# Altium PCB FPGA-Oscilloscope.PcbDoc
Units mil, origin at the board's own origin, x right, y up, seen from the top; angles counter-clockwise.
Board outline 8300 x 5800 mil, 2 copper layers (Top Layer, Bottom Layer); 198 components, 346 nets, 1486 pads, 0 vias.
Unrouted connection lines stored in the file: 899.
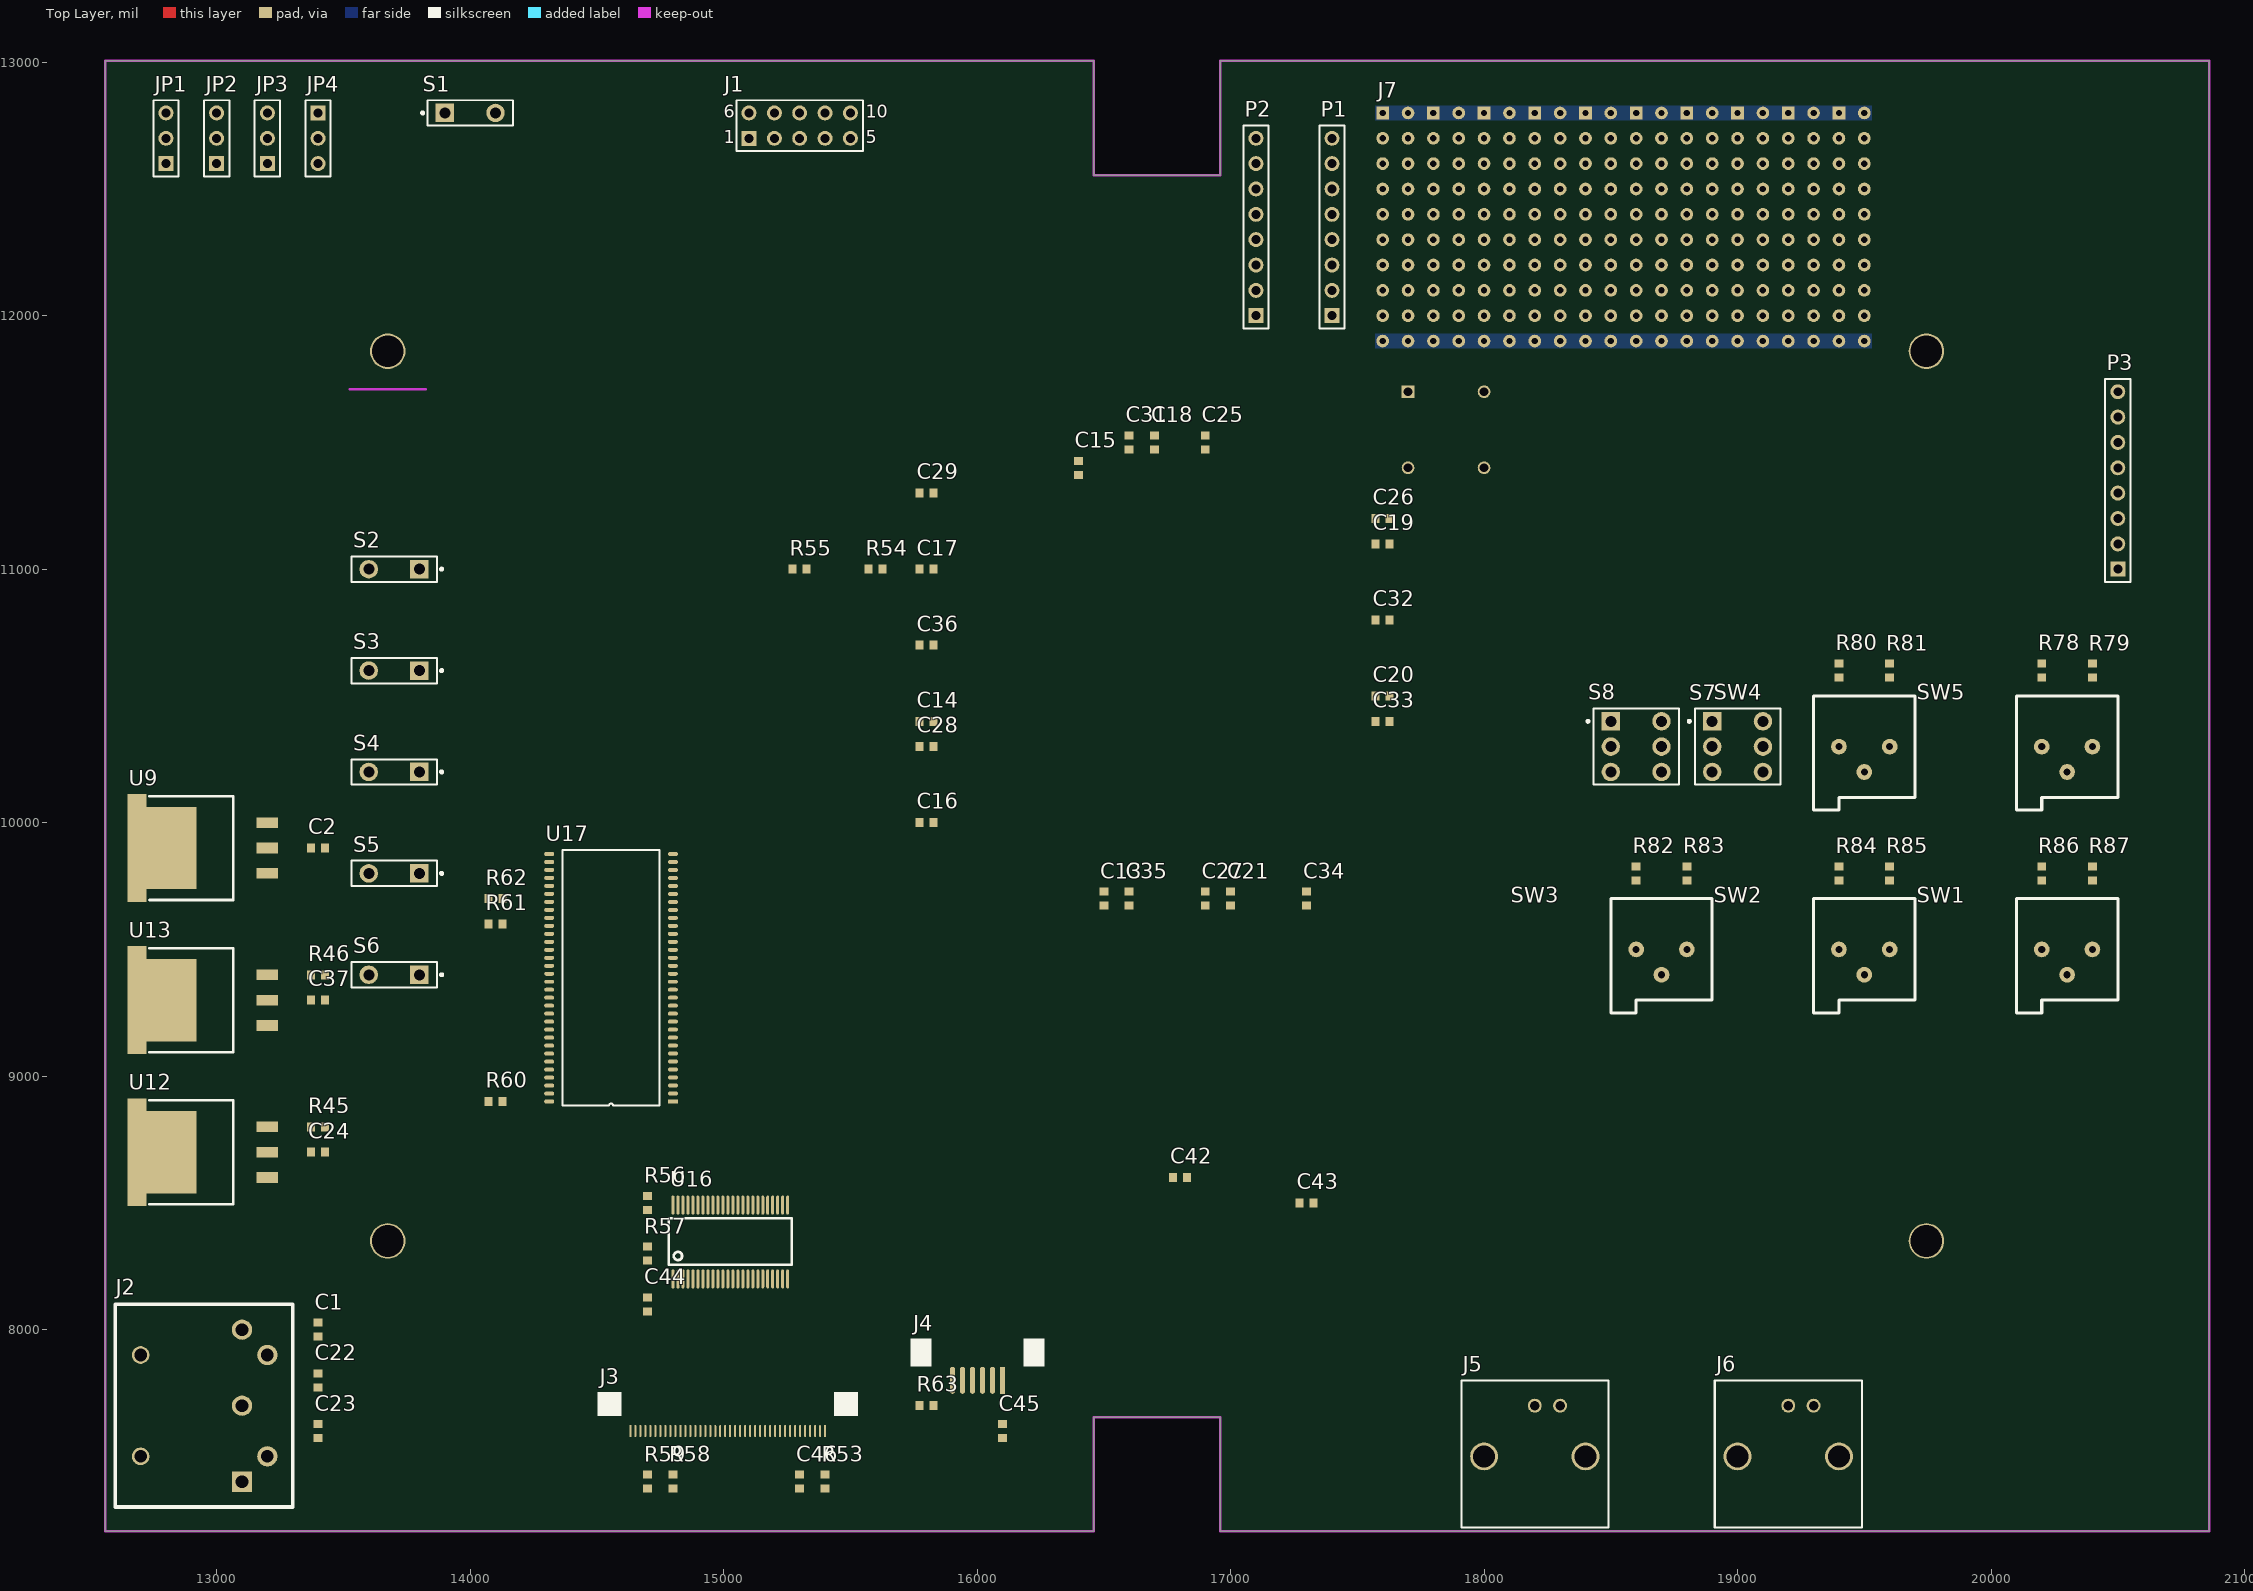
[diagram p0: Top Layer view]
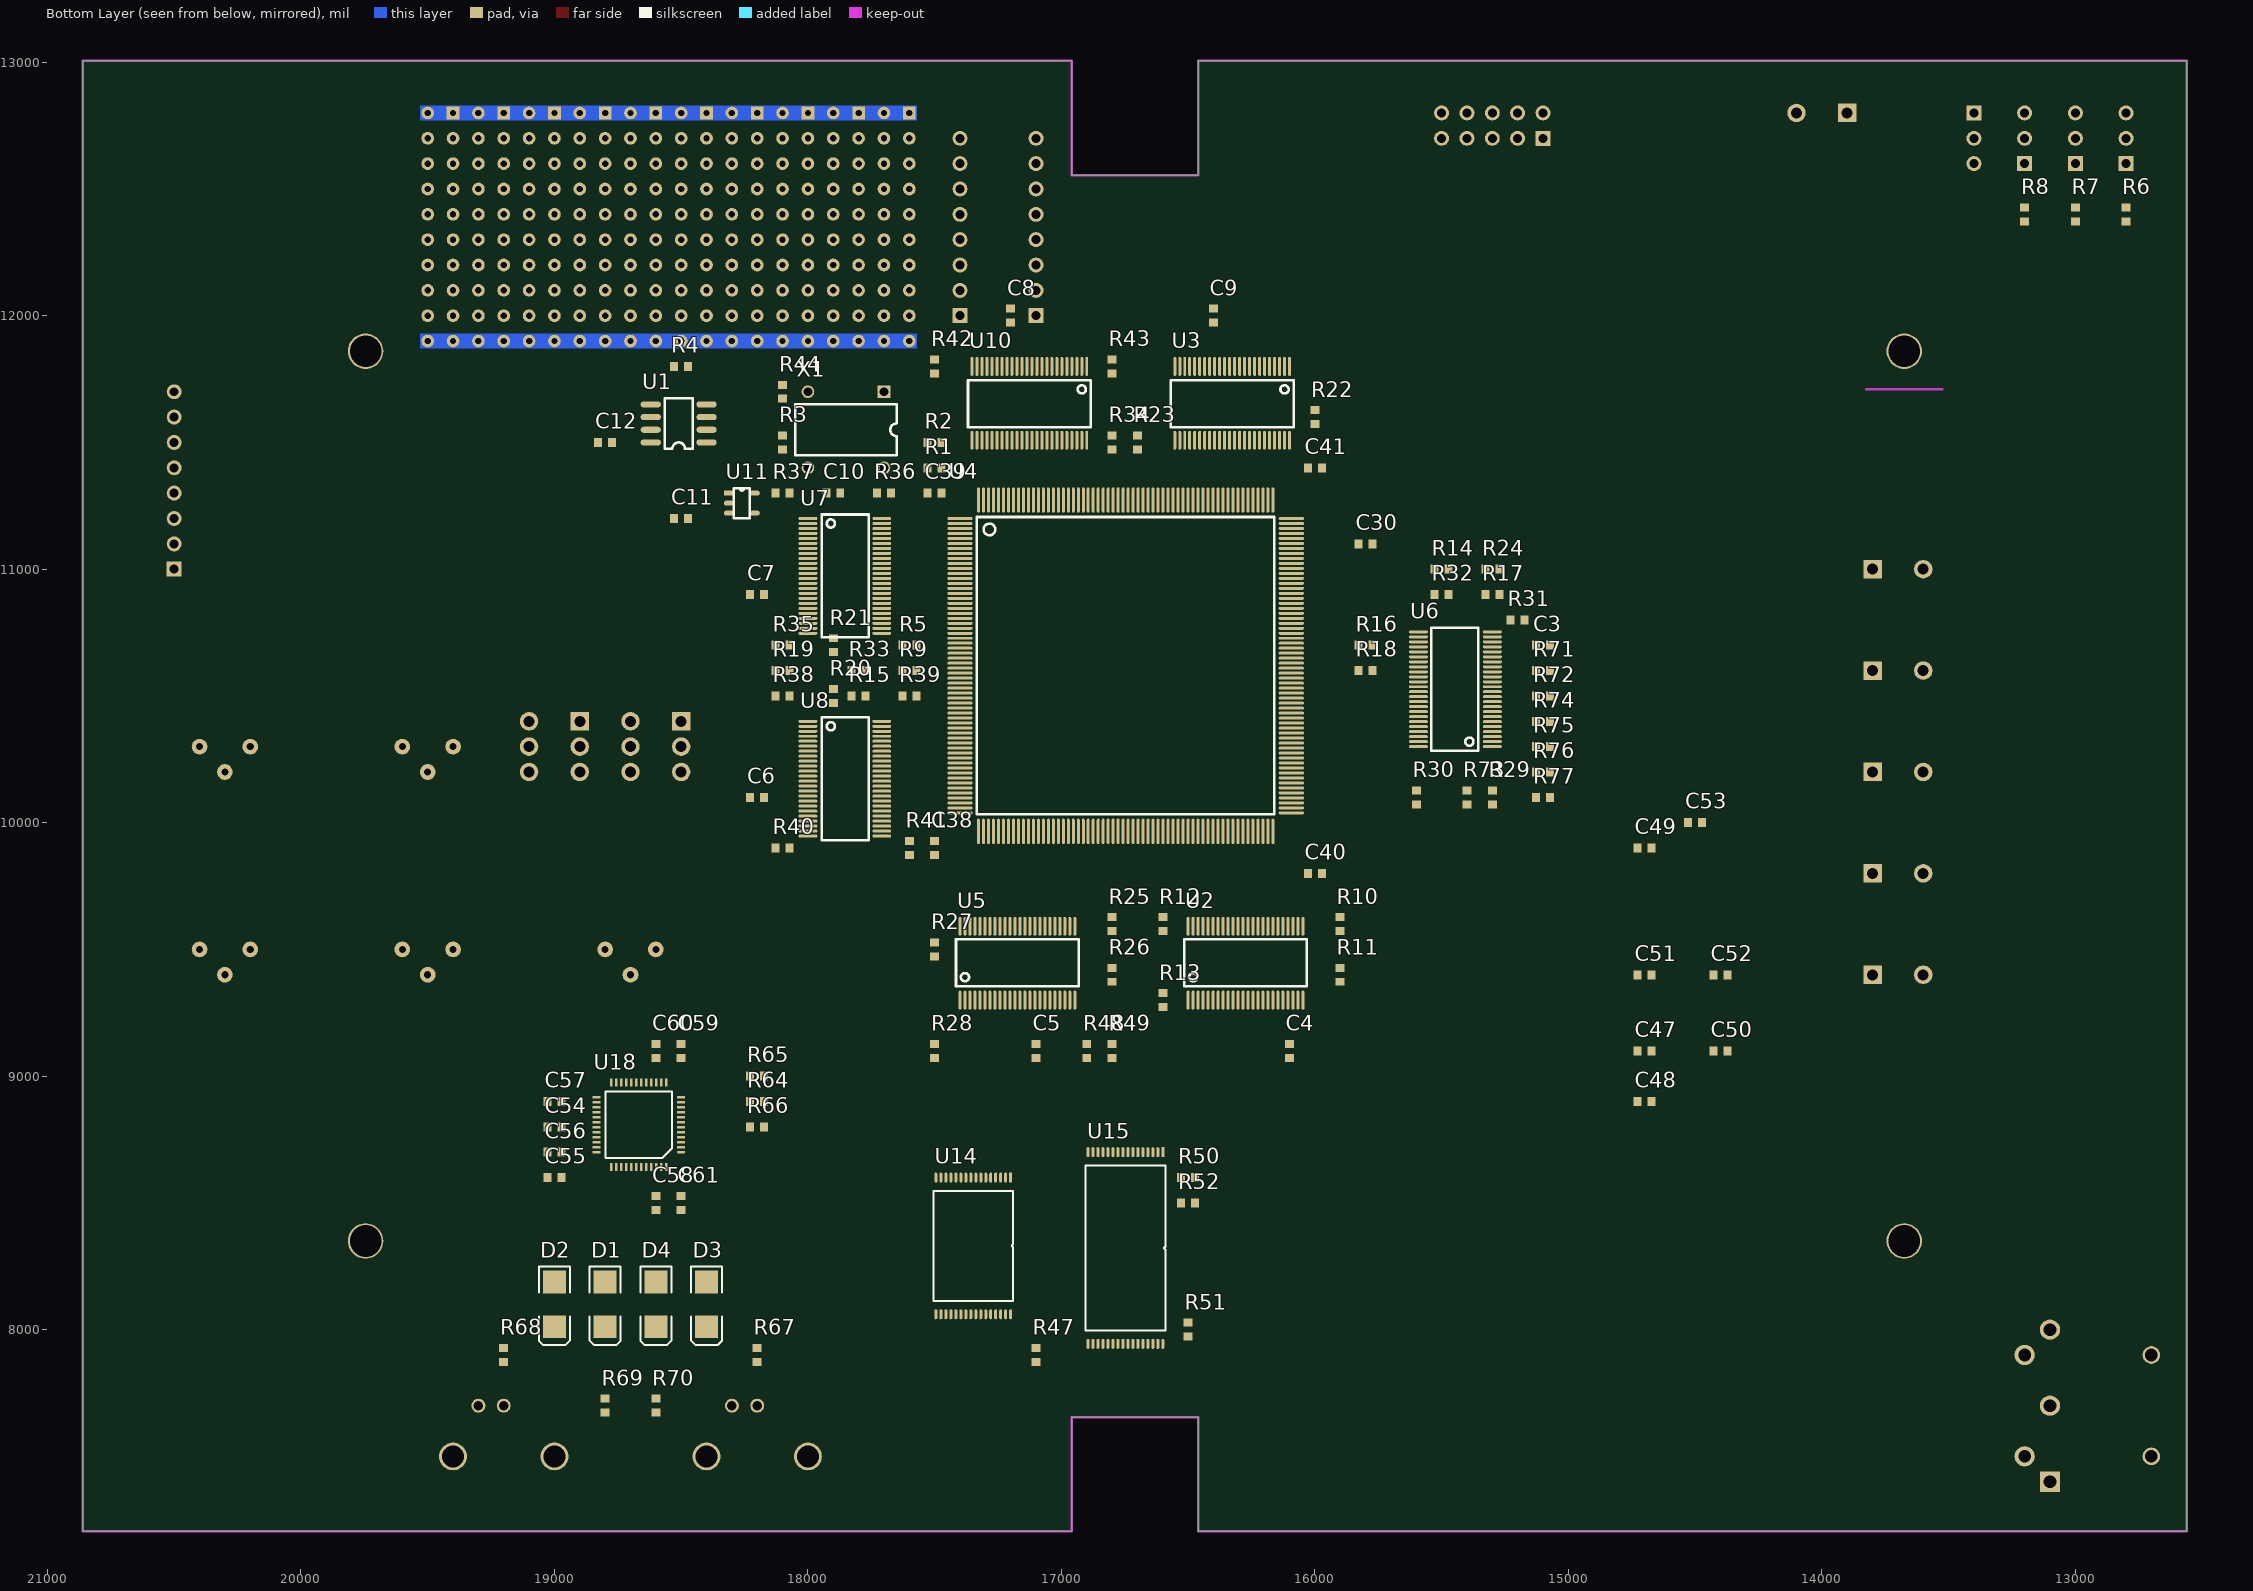
[diagram p1: Bottom Layer view, seen from below]

## Layer stack, top to bottom
Top Layer: signal copper 1.4
Dielectric: dielectric 12.6, FR-4, Dk 4.8
Bottom Layer: signal copper 1.4

## Board outline
12560,7205 12560,13005 16460,13005 16460,12555 16960,12555 16960,13005 20860,13005 20860,7205 16960,7205 16960,7655 16460,7655 16460,7205

## Design rules (kind name [scope] priority, off if disabled: settings)
Clearance [All] p1: gap=8
PolygonConnect [All] p1: connectstyle=Relief reliefconductorwidth=10 reliefentries=4 polygonreliefangle="90 Angle" airgapwidth=10
RoutingVias [All] p1: holewidth=15 width=30 viastyle="Through Hole" minholewidth=15 minwidth=30 maxholewidth=15 maxwidth=30
SMDNeckDown [All] p1: percent=100.000
SolderMaskExpansion [All] p1: expansion=4
Width Power [(InNet('GND') AND InNet('V12+') AND InNet('V12-') AND InNet('VCC') AND InNet('VCC5') AND InNet('VCCA') AND InNet('VCCINT'))] p1: maxlimit=30 minlimit=30 preferedwidth=30 minimp=50.000000 maximp=50.000000 favimp=50.000000
Width [All] p2: maxlimit=10 minlimit=10 preferedwidth=10 minimp=50.000000 maximp=50.000000 favimp=50.000000
28 further rules are at their usual default settings.

## Components (designator, comment, footprint, x,y, rotation, side; value= is the part's Value field where it differs from the comment)
C1 "10uF" 1608[0603] 13400,8000 r90 top
C2 "10uF" 1608[0603] 13400,9900 r180 top
C3 "0.1uF" 1608[0603] 15100,10700 r0 bottom
C4 "0.1uF" 1608[0603] 16100,9100 r90 bottom
C5 "0.1uF" 1608[0603] 17100,9100 r90 bottom
C6 "0.1uF" 1608[0603] 18200,10100 r180 bottom
C7 "0.1uF" 1608[0603] 18200,10900 r180 bottom
C8 "0.1uF" 1608[0603] 17200,12000 r270 bottom
C9 "0.1uF" 1608[0603] 16400,12000 r270 bottom
C10 "0.1uF" 1608[0603] 17900,11300 r180 bottom
C11 "0.1uF" 1608[0603] 18500,11200 r180 bottom
C12 "0.1uF" 1608[0603] 18800,11500 r180 bottom
C13 "0.1uF" 1608[0603] 16500,9700 r90 top
C14 "0.1uF" 1608[0603] 15800,10400 r0 top
C15 "0.1uF" 1608[0603] 16400,11400 r270 top
C16 "0.1uF" 1608[0603] 15800,10000 r0 top
C17 "0.1uF" 1608[0603] 15800,11000 r0 top
C18 "0.1uF" 1608[0603] 16700,11500 r270 top
C19 "0.1uF" 1608[0603] 17600,11100 r180 top
C20 "0.1uF" 1608[0603] 17600,10500 r180 top
C21 "0.1uF" 1608[0603] 17000,9700 r90 top
C22 "10uF" 1608[0603] 13400,7800 r90 top
C23 "10uF" 1608[0603] 13400,7600 r270 top
C24 "10uF" 1608[0603] 13400,8700 r180 top
C25 "0.1uF" 1608[0603] 16900,11500 r270 top
C26 "0.1uF" 1608[0603] 17600,11200 r180 top
C27 "0.1uF" 1608[0603] 16900,9700 r90 top
C28 "0.1uF" 1608[0603] 15800,10300 r0 top
C29 "0.1uF" 1608[0603] 15800,11300 r0 top
C30 "0.1uF" 1608[0603] 15800,11100 r0 bottom
C31 "0.1uF" 1608[0603] 16600,11500 r270 top
C32 "0.1uF" 1608[0603] 17600,10800 r180 top
C33 "0.1uF" 1608[0603] 17600,10400 r180 top
C34 "0.1uF" 1608[0603] 17300,9700 r90 top
C35 "0.1uF" 1608[0603] 16600,9700 r90 top
C36 "0.1uF" 1608[0603] 15800,10700 r0 top
C37 "10uF" 1608[0603] 13400,9300 r180 top
C38 "0.1uF" 1608[0603] 17500,9900 r90 bottom
C39 "0.1uF" 1608[0603] 17500,11300 r0 bottom
C40 "0.1uF" 1608[0603] 16000,9800 r0 bottom
C41 "0.1uF" 1608[0603] 16000,11400 r0 bottom
C42 "0.1uF" 1608[0603] 16800,8600 r180 top
C43 "0.1uF" 1608[0603] 17300,8500 r180 top
C44 "0.1uF" 1608[0603] 14700,8100 r90 top
C45 "0.1uF" 1608[0603] 16100,7600 r90 top
C46 "0.1uF" 1608[0603] 15300,7400 r90 top
C47 "0.1uF" 1608[0603] 14700,9100 r0 bottom
C48 "0.1uF" 1608[0603] 14700,8900 r0 bottom
C49 "0.1uF" 1608[0603] 14700,9900 r0 bottom
C50 "0.1uF" 1608[0603] 14400,9100 r180 bottom
C51 "0.1uF" 1608[0603] 14700,9400 r0 bottom
C52 "0.1uF" 1608[0603] 14400,9400 r180 bottom
C53 "1uF" 1608[0603] 14500,10000 r0 bottom
C54 "" 1608[0603] 19000,8800 r180 bottom
C55 "" 1608[0603] 19000,8600 r180 bottom
C56 "" 1608[0603] 19000,8700 r180 bottom
C57 "" 1608[0603] 19000,8900 r180 bottom
C58 "" 1608[0603] 18600,8500 r90 bottom
C59 "" 1608[0603] 18500,9100 r270 bottom
C60 "" 1608[0603] 18600,9100 r270 bottom
C61 "" 1608[0603] 18500,8500 r90 bottom
D1 "D Schottky" SMB 18800,8100 r270 bottom
D2 "D Schottky" SMB 19000,8100 r270 bottom
D3 "D Schottky" SMB 18400,8100 r270 bottom
D4 "D Schottky" SMB 18600,8100 r270 bottom
J1 "Header 5X2A" HDR2X5_CEN 15100,12700 r0 top
J2 "PS_CONN" DIN5 13300,7300 r180 top
J3 "DISP_CONN" MOLEX-40 15400,7600 r180 top
J4 "TOUCH_CONN" MOLEX-6 16100,7800 r180 top
J5 "BNC" AMP31-5540 18200,7700 r0 top
J6 "BNC" AMP31-5540 19200,7700 r0 top
J7 "Playground" 20x20 17600,12800 r0 top
JP1 "Header 3" HDR1X3 12800,12600 r90 top
JP2 "Header 3" HDR1X3 13000,12600 r90 top
JP3 "Header 3" HDR1X3 13200,12600 r90 top
JP4 "Header 3" HDR1X3 13400,12800 r270 top
P1 "Header 8" HDR1X8 17400,12000 r90 top
P2 "Header 8" HDR1X8 17100,12000 r90 top
P3 "Header 8" HDR1X8 20500,11000 r90 top
R1 "1K" 1608[0603] 17500,11400 r0 bottom
R2 "1K" 1608[0603] 17500,11500 r0 bottom
R3 "10K" 1608[0603] 18100,11500 r90 bottom
R4 "10K" 1608[0603] 18500,11800 r0 bottom
R5 "25" 1608[0603] 17600,10700 r0 bottom
R6 "10K" 1608[0603] 12800,12400 r90 bottom
R7 "10K" 1608[0603] 13000,12400 r90 bottom
R8 "10K" 1608[0603] 13200,12400 r90 bottom
R9 "1K" 1608[0603] 17600,10600 r180 bottom
R10 "10K" 1608[0603] 15900,9600 r90 bottom
R11 "10K" 1608[0603] 15900,9400 r90 bottom
R12 "10K" 1608[0603] 16600,9600 r90 bottom
R13 "10K" 1608[0603] 16600,9300 r270 bottom
R14 "10K" 1608[0603] 15500,11000 r0 bottom
R15 "10K" 1608[0603] 17800,10500 r180 bottom
R16 "10K" 1608[0603] 15800,10700 r0 bottom
R17 "10K" 1608[0603] 15300,10900 r0 bottom
R18 "10K" 1608[0603] 15800,10600 r0 bottom
R19 "10K" 1608[0603] 18100,10600 r180 bottom
R20 "10K" 1608[0603] 17900,10500 r90 bottom
R21 "10K" 1608[0603] 17900,10700 r270 bottom
R22 "10K" 1608[0603] 16000,11600 r90 bottom
R23 "10K" 1608[0603] 16700,11500 r90 bottom
R24 "10K" 1608[0603] 15300,11000 r0 bottom
R25 "10K" 1608[0603] 16800,9600 r270 bottom
R26 "10K" 1608[0603] 16800,9400 r90 bottom
R27 "10K" 1608[0603] 17500,9500 r270 bottom
R28 "10K" 1608[0603] 17500,9100 r270 bottom
R29 "10K" 1608[0603] 15300,10100 r270 bottom
R30 "10K" 1608[0603] 15600,10100 r270 bottom
R31 "10K" 1608[0603] 15200,10800 r180 bottom
R32 "10K" 1608[0603] 15500,10900 r180 bottom
R33 "10K" 1608[0603] 17800,10600 r0 bottom
R34 "10K" 1608[0603] 16800,11500 r270 bottom
R35 "10K" 1608[0603] 18100,10700 r0 bottom
R36 "10K" 1608[0603] 17700,11300 r180 bottom
R37 "10K" 1608[0603] 18100,11300 r0 bottom
R38 "10K" 1608[0603] 18100,10500 r0 bottom
R39 "10K" 1608[0603] 17600,10500 r180 bottom
R40 "10K" 1608[0603] 18100,9900 r0 bottom
R41 "10K" 1608[0603] 17600,9900 r270 bottom
R42 "10K" 1608[0603] 17500,11800 r270 bottom
R43 "10K" 1608[0603] 16800,11800 r270 bottom
R44 "10K" 1608[0603] 18100,11700 r90 bottom
R45 "1" 1608[0603] 13400,8800 r0 top
R46 "1" 1608[0603] 13400,9400 r0 top
R47 "10K" 1608[0603] 17100,7900 r270 bottom
R48 "10K" 1608[0603] 16900,9100 r90 bottom
R49 "10K" 1608[0603] 16800,9100 r90 bottom
R50 "10K" 1608[0603] 16500,8600 r180 bottom
R51 "10K" 1608[0603] 16500,8000 r90 bottom
R52 "10K" 1608[0603] 16500,8500 r180 bottom
R53 "150" 1608[0603] 15400,7400 r90 top
R54 "10K" 1608[0603] 15600,11000 r180 top
R55 "10K" 1608[0603] 15300,11000 r0 top
R56 "10K" 1608[0603] 14700,8500 r90 top
R57 "10K" 1608[0603] 14700,8300 r90 top
R58 "10K" 1608[0603] 14800,7400 r270 top
R59 "10K" 1608[0603] 14700,7400 r270 top
R60 "10K" 1608[0603] 14100,8900 r180 top
R61 "10K" 1608[0603] 14100,9600 r180 top
R62 "10K" 1608[0603] 14100,9700 r180 top
R63 "10K" 1608[0603] 15800,7700 r0 top
R64 "10K" 1608[0603] 18200,8900 r0 bottom
R65 "10K" 1608[0603] 18200,9000 r0 bottom
R66 "10K" 1608[0603] 18200,8800 r0 bottom
R67 "10M" 1608[0603] 18200,7900 r270 bottom
R68 "10M" 1608[0603] 19200,7900 r270 bottom
R69 "3.3M" 1608[0603] 18800,7700 r270 bottom
R70 "3.3M" 1608[0603] 18600,7700 r270 bottom
R71 "10K" 1608[0603] 15100,10600 r180 bottom
R72 "10K" 1608[0603] 15100,10500 r180 bottom
R73 "10K" 1608[0603] 15400,10100 r270 bottom
R74 "10K" 1608[0603] 15100,10400 r180 bottom
R75 "10K" 1608[0603] 15100,10300 r180 bottom
R76 "10K" 1608[0603] 15100,10200 r180 bottom
R77 "10K" 1608[0603] 15100,10100 r180 bottom
R78 "10K" 1608[0603] 20200,10600 r90 top
R79 "10K" 1608[0603] 20400,10600 r90 top
R80 "10K" 1608[0603] 19400,10600 r90 top
R81 "10K" 1608[0603] 19600,10600 r90 top
R82 "10K" 1608[0603] 18600,9800 r90 top
R83 "10K" 1608[0603] 18800,9800 r90 top
R84 "10K" 1608[0603] 19400,9800 r90 top
R85 "10K" 1608[0603] 19600,9800 r90 top
R86 "10K" 1608[0603] 20200,9800 r90 top
R87 "10K" 1608[0603] 20400,9800 r90 top
S1 "SW-PB" SPST-2 14000,12800 r0 top
S2 "SW-PB" SPST-2 13700,11000 r180 top
S3 "SW-PB" SPST-2 13700,10600 r180 top
S4 "SW-PB" SPST-2 13700,10200 r180 top
S5 "SW-PB" SPST-2 13700,9800 r180 top
S6 "SW-PB" SPST-2 13700,9400 r180 top
S7 "SW-DPDT" DPDT-6 19000,10300 r0 top
S8 "SW-DPDT" DPDT-6 18600,10300 r0 top
SW1 "SW-ROTARY" VR4 20400,9500 r180 top
SW2 "SW-ROTARY" VR4 19600,9500 r180 top
SW3 "SW-ROTARY" VR4 18800,9500 r180 top
SW4 "SW-ROTARY" VR4 19600,10300 r180 top
SW5 "SW-ROTARY" VR4 20400,10300 r180 top
U1 "EPCS1" SO-8 18400,11500 r0 bottom
U2 "74LVTH162245" TSSOP48 16500,9300 r180 bottom
U3 "74LVTH162245" TSSOP48 16100,11800 r0 bottom
U4 "EP3C25Q240" PQFP240 17400,11200 r180 bottom
U5 "74LVTH162245" TSSOP48 17400,9300 r180 bottom
U6 "74LVTH162245" TSSOP48 15300,10300 r90 bottom
U7 "74LVTH162245" TSSOP48 18000,11200 r270 bottom
U8 "74LVTH162245" TSSOP48 18000,10400 r270 bottom
U9 "LM1086" TO-263 13200,9800 r0 top
U10 "74LVTH162245" TSSOP48 16900,11800 r0 bottom
U11 "ADM8316" SOT-23 18300,11300 r180 bottom
U12 "LM1086" TO-263 13200,8600 r0 top
U13 "LM1086" TO-263 13200,9200 r0 top
U14 "SST39VF020" "TSOP-32 8x14mm" 17200,8600 r270 bottom
U15 "AS7C31024B" "TSOP-32 8x20mm" 16600,8700 r270 bottom
U16 "74LVTH162245" TSSOP48 14800,8200 r0 top
U17 "MSM5416283" SSOP64 14800,8900 r180 top
U18 "AD9288" QFP24-7x7 18500,8700 r0 bottom
X1 "OSCOE" DIP8-4 17700,11700 r270 bottom

## Footprints (in the part's own frame and the unit in brackets; to place one, negate y for a bottom-side part, rotate by r counter-clockwise, add the part's x,y. Pads: shape width x height; smd on the part's side, far side on the other; paste and mask are expansions set on the pad)
20x20 [mil]
  rect 50x50 hole 25: 1(200,0) 1(400,0) 1(600,0) 1(800,0) 1(1000,0) 1(1200,0) 1(1400,0) 1(1600,0) 1(1800,0) PGVCC(0,0)
  round 50 hole 25: 2(0,-100) 2(200,-100) 2(400,-100) 2(600,-100) 2(800,-100) 2(1000,-100) 2(1200,-100) 2(1400,-100) 2(1600,-100) 2(1800,-100) 3(0,-200) 3(200,-200) 3(400,-200) 3(600,-200) 3(800,-200) 3(1000,-200) 3(1200,-200) 3(1400,-200) 3(1600,-200) 3(1800,-200) 4(0,-300) 4(200,-300) 4(400,-300) 4(600,-300) 4(800,-300) 4(1000,-300) 4(1200,-300) 4(1400,-300) 4(1600,-300) 4(1800,-300) 5(0,-400) 5(200,-400) 5(400,-400) 5(600,-400) 5(800,-400) 5(1000,-400) 5(1200,-400) 5(1400,-400) 5(1600,-400) 5(1800,-400) 6(0,-500) 6(200,-500) 6(400,-500) 6(600,-500) 6(800,-500) 6(1000,-500) 6(1200,-500) 6(1400,-500) 6(1600,-500) 6(1800,-500) 7(0,-600) 7(200,-600) 7(400,-600) 7(600,-600) 7(800,-600) 7(1000,-600) 7(1200,-600) 7(1400,-600) 7(1600,-600) 7(1800,-600) 8(0,-700) 8(200,-700) 8(400,-700) 8(600,-700) 8(800,-700) 8(1000,-700) 8(1200,-700) 8(1400,-700) 8(1600,-700) 8(1800,-700) 9(0,-800) 9(200,-800) 9(400,-800) 9(600,-800) 9(800,-800) 9(1000,-800) 9(1200,-800) 9(1400,-800) 9(1600,-800) 9(1800,-800) 10(200,-900) 10(400,-900) 10(600,-900) 10(800,-900) 10(1000,-900) 10(1200,-900) 10(1400,-900) 10(1600,-900) 10(1800,-900) 11(100,-900) 11(300,-900) 11(500,-900) 11(700,-900) 11(900,-900) 11(1100,-900) 11(1300,-900) 11(1500,-900) 11(1700,-900) 11(1900,-900) 12(100,-800) 12(300,-800) 12(500,-800) 12(700,-800) 12(900,-800) 12(1100,-800) 12(1300,-800) 12(1500,-800) 12(1700,-800) 12(1900,-800) 13(100,-700) 13(300,-700) 13(500,-700) 13(700,-700) 13(900,-700) 13(1100,-700) 13(1300,-700) 13(1500,-700) 13(1700,-700) 13(1900,-700) 14(100,-600) 14(300,-600) 14(500,-600) 14(700,-600) 14(900,-600) 14(1100,-600) 14(1300,-600) 14(1500,-600) 14(1700,-600) 14(1900,-600) 15(100,-500) 15(300,-500) 15(500,-500) 15(700,-500) 15(900,-500) 15(1100,-500) 15(1300,-500) 15(1500,-500) 15(1700,-500) 15(1900,-500) 16(100,-400) 16(300,-400) 16(500,-400) 16(700,-400) 16(900,-400) 16(1100,-400) 16(1300,-400) 16(1500,-400) 16(1700,-400) 16(1900,-400) 17(100,-300) 17(300,-300) 17(500,-300) 17(700,-300) 17(900,-300) 17(1100,-300) 17(1300,-300) 17(1500,-300) 17(1700,-300) 17(1900,-300) 18(100,-200) 18(300,-200) 18(500,-200) 18(700,-200) 18(900,-200) 18(1100,-200) 18(1300,-200) 18(1500,-200) 18(1700,-200) 18(1900,-200) 19(100,-100) 19(300,-100) 19(500,-100) 19(700,-100) 19(900,-100) 19(1100,-100) 19(1300,-100) 19(1500,-100) 19(1700,-100) 19(1900,-100) 20(100,0) 20(300,0) 20(500,0) 20(700,0) 20(900,0) 20(1100,0) 20(1300,0) 20(1500,0) 20(1700,0) 20(1900,0) PGGND(0,-900)
  Bottom Layer region: -30,-930 1930,-930 1930,-870 -30,-870
  Bottom Layer region: -30,-30 1930,-30 1930,30 -30,30
1608[0603] [mm] "Chip Capacitor, Body 1.6x0.8mm, IPC High Density"
  rect 0.8x0.9 smd: 1(-0.7,0) 2(0.7,0)
  body extent -0.87,-0.48 0.87,0.48, height 1.3
AMP31-5540 [mil]
  round 55 hole 38: 1(0,0) 2(100,0)
  round 110 hole 86: ""(-200,-200) ""(200,-200)
  silkscreen extent -290,-480 290,100
DIN5 [mil]
  rect 80x80 hole 50: 1(200,-100)
  round 80 hole 50: 2(100,-200) 3(200,-400) 4(100,-600) 5(200,-700)
  round 70 hole 50: ""(600,-200) ""(600,-600)
  silkscreen extent 0,-800 700,0
DIP8-4 [mil]
  rect 50x50 hole 35: 1(0,0)
  round 50 hole 35: 2(0,-300) 3(300,-300) 4(300,0)
  silkscreen extent 50,-350 250,50
DPDT-6 [mm] "Switch; 6 Leads"
  rect 1.85x1.85 hole 1.1: 1(-2.54,2.54)
  round 1.85 hole 1.1: 2(-2.54,0) 3(-2.54,-2.54) 4(2.54,-2.54) 5(2.54,0) 6(2.54,2.54)
  silkscreen extent -4.96,-3.81 4.28,3.81
HDR1X3 [mm] "Connector; Header; 3 Position"
  rect 1.5x1.5 hole 0.9: 1(0,0)
  round 1.5 hole 0.9: 2(2.54,0) 3(5.08,0)
  silkscreen extent -1.27,-1.27 6.35,1.27
HDR1X8 [mm] "Connector; Header; 8 Position"
  rect 1.5x1.5 hole 0.9: 1(0,0)
  round 1.5 hole 0.9: 2(2.54,0) 3(5.08,0) 4(7.62,0) 5(10.16,0) 6(12.7,0) 7(15.24,0) 8(17.78,0)
  silkscreen extent -1.27,-1.27 19.05,1.27
HDR2X5_CEN [mm] "Connector; Header; 5x2 Position"
  rect 1.5x1.5 hole 0.9: 1(0,0)
  round 1.5 hole 0.9: 2(2.54,0) 3(5.08,0) 4(7.62,0) 5(10.16,0) 6(0,2.54) 7(2.54,2.54) 8(5.08,2.54) 9(7.62,2.54) 10(10.16,2.54)
  silkscreen extent -1.27,-1.27 11.43,3.81
MOLEX-6 [mm]
  rect 0.5x2.7 smd: 1(0,0)
  oval 0.5x2.7 smd: 2(1,0) 3(2,0) 4(3,0) 5(4,0) 6(5,0)
  silkscreen extent -4.2,-4.2 9.2,-1.4
MOLEX-40 [mm]
  rect 0.2x1.2 smd: 1(0,0) 10(4.5,0) 20(9.5,0) 30(14.5,0) 40(19.5,0)
  oval 0.2x1.2 smd: 2(0.5,0) 3(1,0) 4(1.5,0) 5(2,0) 6(2.5,0) 7(3,0) 8(3.5,0) 9(4,0) 11(5,0) 12(5.5,0) 13(6,0) 14(6.5,0) 15(7,0) 16(7.5,0) 17(8,0) 18(8.5,0) 19(9,0) 21(10,0) 22(10.5,0) 23(11,0) 24(11.5,0) 25(12,0) 26(12.5,0) 27(13,0) 28(13.5,0) 29(14,0) 31(15,0) 32(15.5,0) 33(16,0) 34(16.5,0) 35(17,0) 36(17.5,0) 37(18,0) 38(18.5,0) 39(19,0)
  silkscreen extent -3.3,-3.9 22.8,-1.5
PQFP240 [mm]
  oval 2.54x0.3 smd: 1(0,0) 2(0,-0.5) 3(0,-1) 4(0,-1.5) 5(0,-2) 6(0,-2.5) 7(0,-3) 8(0,-3.5) 9(0,-4) 10(0,-4.5) 11(0,-5) 12(0,-5.5) 13(0,-6) 14(0,-6.5) 15(0,-7) 16(0,-7.5) 17(0,-8) 18(0,-8.5) 19(0,-9) 20(0,-9.5) 21(0,-10) 22(0,-10.5) 23(0,-11) 24(0,-11.5) 25(0,-12) 26(0,-12.5) 27(0,-13) 28(0,-13.5) 29(0,-14) 30(0,-14.5) 31(0,-15) 32(0,-15.5) 33(0,-16) 34(0,-16.5) 35(0,-17) 36(0,-17.5) 37(0,-18) 38(0,-18.5) 39(0,-19) 40(0,-19.5) 41(0,-20) 42(0,-20.5) 43(0,-21) 44(0,-21.5) 45(0,-22) 46(0,-22.5) 47(0,-23) 48(0,-23.5) 49(0,-24) 50(0,-24.5) 51(0,-25) 52(0,-25.5) 53(0,-26) 54(0,-26.5) 55(0,-27) 56(0,-27.5) 57(0,-28) 58(0,-28.5) 59(0,-29) 60(0,-29.5) 121(33.2,-29.5) 122(33.2,-29) 123(33.2,-28.5) 124(33.2,-28) 125(33.2,-27.5) 126(33.2,-27) 127(33.2,-26.5) 128(33.2,-26) 129(33.2,-25.5) 130(33.2,-25) 131(33.2,-24.5) 132(33.2,-24) 133(33.2,-23.5) 134(33.2,-23) 135(33.2,-22.5) 136(33.2,-22) 137(33.2,-21.5) 138(33.2,-21) 139(33.2,-20.5) 140(33.2,-20) 141(33.2,-19.5) 142(33.2,-19) 143(33.2,-18.5) 144(33.2,-18) 145(33.2,-17.5) 146(33.2,-17) 147(33.2,-16.5) 148(33.2,-16) 149(33.2,-15.5) 150(33.2,-15) 151(33.2,-14.5) 152(33.2,-14) 153(33.2,-13.5) 154(33.2,-13) 155(33.2,-12.5) 156(33.2,-12) 157(33.2,-11.5) 158(33.2,-11) 159(33.2,-10.5) 160(33.2,-10) 161(33.2,-9.5) 162(33.2,-9) 163(33.2,-8.5) 164(33.2,-8) 165(33.2,-7.5) 166(33.2,-7) 167(33.2,-6.5) 168(33.2,-6) 169(33.2,-5.5) 170(33.2,-5) 171(33.2,-4.5) 172(33.2,-4) 173(33.2,-3.5) 174(33.2,-3) 175(33.2,-2.5) 176(33.2,-2) 177(33.2,-1.5) 178(33.2,-1) 179(33.2,-0.5) 180(33.2,0)
  oval 0.3x2.54 smd: 61(1.85,-31.35) 62(2.35,-31.35) 63(2.85,-31.35) 64(3.35,-31.35) 65(3.85,-31.35) 66(4.35,-31.35) 67(4.85,-31.35) 68(5.35,-31.35) 69(5.85,-31.35) 70(6.35,-31.35) 71(6.85,-31.35) 72(7.35,-31.35) 73(7.85,-31.35) 74(8.35,-31.35) 75(8.85,-31.35) 76(9.35,-31.35) 77(9.85,-31.35) 78(10.35,-31.35) 79(10.85,-31.35) 80(11.35,-31.35) 81(11.85,-31.35) 82(12.35,-31.35) 83(12.85,-31.35) 84(13.35,-31.35) 85(13.85,-31.35) 86(14.35,-31.35) 87(14.85,-31.35) 88(15.35,-31.35) 89(15.85,-31.35) 90(16.35,-31.35) 91(16.85,-31.35) 92(17.35,-31.35) 93(17.85,-31.35) 94(18.35,-31.35) 95(18.85,-31.35) 96(19.35,-31.35) 97(19.85,-31.35) 98(20.35,-31.35) 99(20.85,-31.35) 100(21.35,-31.35) 101(21.85,-31.35) 102(22.35,-31.35) 103(22.85,-31.35) 104(23.35,-31.35) 105(23.85,-31.35) 106(24.35,-31.35) 107(24.85,-31.35) 108(25.35,-31.35) 109(25.85,-31.35) 110(26.35,-31.35) 111(26.85,-31.35) 112(27.35,-31.35) 113(27.85,-31.35) 114(28.35,-31.35) 115(28.85,-31.35) 116(29.35,-31.35) 117(29.85,-31.35) 118(30.35,-31.35) 119(30.85,-31.35) 120(31.35,-31.35) 181(31.35,1.85) 182(30.85,1.85) 183(30.35,1.85) 184(29.85,1.85) 185(29.35,1.85) 186(28.85,1.85) 187(28.35,1.85) 188(27.85,1.85) 189(27.35,1.85) 190(26.85,1.85) 191(26.35,1.85) 192(25.85,1.85) 193(25.35,1.85) 194(24.85,1.85) 195(24.35,1.85) 196(23.85,1.85) 197(23.35,1.85) 198(22.85,1.85) 199(22.35,1.85) 200(21.85,1.85) 201(21.35,1.85) 202(20.85,1.85) 203(20.35,1.85) 204(19.85,1.85) 205(19.35,1.85) 206(18.85,1.85) 207(18.35,1.85) 208(17.85,1.85) 209(17.35,1.85) 210(16.85,1.85) 211(16.35,1.85) 212(15.85,1.85) 213(15.35,1.85) 214(14.85,1.85) 215(14.35,1.85) 216(13.85,1.85) 217(13.35,1.85) 218(12.85,1.85) 219(12.35,1.85) 220(11.85,1.85) 221(11.35,1.85) 222(10.85,1.85) 223(10.35,1.85) 224(9.85,1.85) 225(9.35,1.85) 226(8.85,1.85) 227(8.35,1.85) 228(7.85,1.85) 229(7.35,1.85) 230(6.85,1.85) 231(6.35,1.85) 232(5.85,1.85) 233(5.35,1.85) 234(4.85,1.85) 235(4.35,1.85) 236(3.85,1.85) 237(3.35,1.85) 238(2.85,1.85) 239(2.35,1.85) 240(1.85,1.85)
  silkscreen extent 1.7,-29.62 31.5,0.15
QFP24-7x7 [mm]
  oval 0.8x0.25 smd: 1(0,0)
  rect 0.8x0.25 smd: 2(0,-0.5) 3(0,-1) 4(0,-1.5) 5(0,-2) 6(0,-2.5) 7(0,-3) 8(0,-3.5) 9(0,-4) 10(0,-4.5) 11(0,-5) 12(0,-5.5) 25(8.5,-5.5) 26(8.5,-5) 27(8.5,-4.5) 28(8.5,-4) 29(8.5,-3.5) 30(8.5,-3) 31(8.5,-2.5) 32(8.5,-2) 33(8.5,-1.5) 34(8.5,-1) 35(8.5,-0.5) 36(8.5,0)
  rect 0.25x0.8 smd: 13(1.5,-7) 14(2,-7) 15(2.5,-7) 16(3,-7) 17(3.5,-7) 18(4,-7) 19(4.5,-7) 20(5,-7) 21(5.5,-7) 22(6,-7) 23(6.5,-7) 24(7,-7) 37(7,1.5) 38(6.5,1.5) 39(6,1.5) 40(5.5,1.5) 41(5,1.5) 42(4.5,1.5) 43(4,1.5) 44(3.5,1.5) 45(3,1.5) 46(2.5,1.5) 47(2,1.5) 48(1.5,1.5)
  silkscreen extent 0.94,-6.07 7.56,0.56
SMB [mm] "DO-214-AA/SMB; 2 C-Bend Leads; Body 5.3 x 3.6 mm, inc. leads (LxW)"
  rect 2.3x2.3 smd: 1(-2.25,0) 2(2.25,0)
  silkscreen extent -3.8,-1.55 4.1,1.55
SO-8 [mil]
  oval 80x24 smd: 1(0,0) 2(0,-50) 3(0,-100) 4(0,-150) 5(220,-150) 6(220,-100) 7(220,-50) 8(220,0)
  silkscreen extent 55,-175 165,25
SOT-23 [mm]
  rect 1x0.5 smd: 1(-0.3,0)
  oval 1x0.5 smd: 2(-0.3,-1) 3(-0.3,-2) 4(2.3,-2) 5(2.3,0)
  silkscreen extent 0.2,-2.5 1.78,0.5
SPST-2 [mm] "Switch; 2 Leads"
  rect 1.85x1.85 hole 1.1: 1(-2.54,0)
  round 1.85 hole 1.1: 2(2.54,0)
  silkscreen extent -4.89,-1.27 4.28,1.27
SSOP64 [mm]
  rect 1x0.4 smd: 1(0,0)
  oval 1x0.4 smd: 2(0,-0.8) 3(0,-1.6) 4(0,-2.4) 5(0,-3.2) 6(0,-4) 7(0,-4.8) 8(0,-5.6) 9(0,-6.4) 10(0,-7.2) 11(0,-8) 12(0,-8.8) 13(0,-9.6) 14(0,-10.4) 15(0,-11.2) 16(0,-12) 17(0,-12.8) 18(0,-13.6) 19(0,-14.4) 20(0,-15.2) 21(0,-16) 22(0,-16.8) 23(0,-17.6) 24(0,-18.4) 25(0,-19.2) 26(0,-20) 27(0,-20.8) 28(0,-21.6) 29(0,-22.4) 30(0,-23.2) 31(0,-24) 32(0,-24.8) 33(12.4,-24.8) 34(12.4,-24) 35(12.4,-23.2) 36(12.4,-22.4) 37(12.4,-21.6) 38(12.4,-20.8) 39(12.4,-20) 40(12.4,-19.2) 41(12.4,-18.4) 42(12.4,-17.6) 43(12.4,-16.8) 44(12.4,-16) 45(12.4,-15.2) 46(12.4,-14.4) 47(12.4,-13.6) 48(12.4,-12.8) 49(12.4,-12) 50(12.4,-11.2) 51(12.4,-10.4) 52(12.4,-9.6) 53(12.4,-8.8) 54(12.4,-8) 55(12.4,-7.2) 56(12.4,-6.4) 57(12.4,-5.6) 58(12.4,-4.8) 59(12.4,-4) 60(12.4,-3.2) 61(12.4,-2.4) 62(12.4,-1.6) 63(12.4,-0.8) 64(12.4,0)
  silkscreen extent 1.34,-25.2 11.07,0.4
TO-263 [mil]
  rect 85x42 smd: 1(0,0) 2(0,100) 3(0,200)
  rect 75x425 smd: ""(-515,100)
  rect 200x325 smd: ""(-380,100)
  silkscreen extent -465,-105 -135,305
"TSOP-32 8x14mm" [mm] "Use with SST39VF020"
  rect 1x0.3 smd: 1(0,0)
  oval 1x0.3 smd: 2(0,-0.5) 3(0,-1) 4(0,-1.5) 5(0,-2) 6(0,-2.5) 7(0,-3) 8(0,-3.5) 9(0,-4) 10(0,-4.5) 11(0,-5) 12(0,-5.5) 13(0,-6) 14(0,-6.5) 15(0,-7) 16(0,-7.5) 17(13.7,-7.5) 18(13.7,-7) 19(13.7,-6.5) 20(13.7,-6) 21(13.7,-5.5) 22(13.7,-5) 23(13.7,-4.5) 24(13.7,-4) 25(13.7,-3.5) 26(13.7,-3) 27(13.7,-2.5) 28(13.7,-2) 29(13.7,-1.5) 30(13.7,-1) 31(13.7,-0.5) 32(13.7,0)
  silkscreen extent 1.34,-7.75 12.37,0.25
"TSOP-32 8x20mm" [mm] "Use with AS7C31024B"
  rect 1x0.3 smd: 1(0,0)
  oval 1x0.3 smd: 2(0,-0.5) 3(0,-1) 4(0,-1.5) 5(0,-2) 6(0,-2.5) 7(0,-3) 8(0,-3.5) 9(0,-4) 10(0,-4.5) 11(0,-5) 12(0,-5.5) 13(0,-6) 14(0,-6.5) 15(0,-7) 16(0,-7.5) 17(19.2,-7.5) 18(19.2,-7) 19(19.2,-6.5) 20(19.2,-6) 21(19.2,-5.5) 22(19.2,-5) 23(19.2,-4.5) 24(19.2,-4) 25(19.2,-3.5) 26(19.2,-3) 27(19.2,-2.5) 28(19.2,-2) 29(19.2,-1.5) 30(19.2,-1) 31(19.2,-0.5) 32(19.2,0)
  silkscreen extent 1.33,-7.75 17.86,0.25
TSSOP48 [mm]
  oval 0.3x1.9 smd: 1(0,0) 2(0.5,0) 3(1,0) 4(1.5,0) 5(2,0) 6(2.5,0) 7(3,0) 8(3.5,0) 9(4,0) 10(4.5,0) 11(5,0) 12(5.5,0) 13(6,0) 14(6.5,0) 15(7,0) 16(7.5,0) 17(8,0) 18(8.5,0) 19(9,0) 20(9.5,0) 21(10,0) 22(10.5,0) 23(11,0) 24(11.5,0) 25(11.5,7.4) 26(11,7.4) 27(10.5,7.4) 28(10,7.4) 29(9.5,7.4) 30(9,7.4) 31(8.5,7.4) 32(8,7.4) 33(7.5,7.4) 34(7,7.4) 35(6.5,7.4) 36(6,7.4) 37(5.5,7.4) 38(5,7.4) 39(4.5,7.4) 40(4,7.4) 41(3.5,7.4) 42(3,7.4) 43(2.5,7.4) 44(2,7.4) 45(1.5,7.4) 46(1,7.4) 47(0.5,7.4) 48(0,7.4)
  silkscreen extent -0.4,1.4 11.9,6.1
VR4 [mil]
  round 62 hole 28: 1(0,0) 2(100,100) 3(200,0)
  silkscreen extent -100,-200 300,250

## Part data
C1 C2 C3 C4 C5 C6 C7 C8 C9 C10 C11 C12 C13 C14 C15 C16 C17 C18 C19 C20 C21 C22 C23 C24 C25 C26 C27 C28 C29 C30 C31 C32 C33 C34 C35 C36 C37 C38 C39 C40 C41 C42 C43 C44 C45 C46 C47 C48 C49 C50 C51 C52 C53 C54 C55 C56 C57 C58 C59 C60 C61: library part "Cap Semi", "Capacitor (Semiconductor SIM Model)"
D1 D2 D3 D4: "Schottky Diode"
J1: "Header, 5-Pin, Dual row"
J2: "Elpac Compatible Power Supply Connector"
J3: library part NHD-4.3-Display-connector
J4: library part NHD-4.3-Touch-connector
J5 J6: "BNC Connector"
JP1 JP2 JP3 JP4: "Header, 3-Pin"
P1 P2 P3: "Header, 8-Pin"
R1 R2 R3 R4 R5 R6 R7 R8 R9 R10 R11 R12 R13 R14 R15 R16 R17 R18 R19 R20 R21 R22 R23 R24 R25 R26 R27 R28 R29 R30 R31 R32 R33 R34 R35 R36 R37 R38 R39 R40 R41 R42 R43 R44 R45 R46 R47 R48 R49 R50 R51 R52 R53 R54 R55 R56 R57 R58 R59 R60 R61 R62 R63 R64 R65 R66 R67 R68 R69 R70 R71 R72 R73 R74 R75 R76 R77 R78 R79 R80 R81 R82 R83 R84 R85 R86 R87: library part RES1
S1 S2 S3 S4 S5 S6: "Switch"
S7 S8: "Double-Pole, Double-Throw Switch"
SW1 SW2 SW3 SW4 SW5: "Rotary Encoder"
U1: "Altera Serial Configuration Device"
U2 U3 U5 U6 U7 U8 U10 U16: "16-Bit Bus Transceiver"
U4: "Cyclone III EP3C-25 FPGA PQFP240"
U9 U12 U13: "1.5A Low Dropout Positive Regulator"
U11: "Analog Devices Watchdog Timer and Reset IC"
U14: "Microchip 2 Mbit (256k x 8 bit) Multi-Purpose Flash"
U15: "Alliance 1 Mbit (128k x 8bit) SRAM"
U17: "256K x 16bit VRAM"
U18: "Dual Channel ADC"
X1: "Oscillator with Active High Output Enable"

## Free pads (board coordinates)
  round 140 hole 125: 1(13675,8350) 2(13675,11860) 3(19745,8350) 4(19745,11860)

## Nets (pads, with @x,y where several pads share a name; then routed paths per layer and width w, separated by ;. In a path a pad name is that pad's centre, name@x,y a point inside that pad or via, vN(x,y) a via of type N, cw(c..) or ccw(c..) an arc to the next point about the centre after c; other vN are vias at no path point)
AB0: U2.23 U14.20 U15.20 U17.37
AB1: U2.22 U14.19 U15.19 U17.36
AB2: U2.20 U14.18 U15.18 U17.35
AB3: U2.19 U14.17 U15.17 U17.34
AB4: U2.17 U14.16 U15.16 U17.31
AB5: U2.16 U14.15 U15.15 U17.30
AB6: U2.14 U14.14 U15.14 U17.29
AB7: U2.13 U14.13 U15.13 U17.28
AB8: U2.12 U14.3 U15.3 U17.27
AB9: U2.11 U14.2 U15.2
AB10: U2.9 U14.31 U15.31
AB11: U2.8 U14.1 U15.1
AB12: U2.6 U14.12 U15.12
AB13: U2.5 U14.4 U15.4
AB14: U2.3 U14.5 U15.11
AB15: U2.2 U14.11 U15.7
ADCA0: U5.23 U18.37
ADCA1: U5.22 U18.38
ADCA2: U5.20 U18.39
ADCA3: U5.19 U18.40
ADCA4: U5.17 U18.41
ADCA5: U5.16 U18.42
ADCA6: U5.14 U18.43
ADCA7: U5.13 U18.44
ADCB0: U5.2 U18.24
ADCB1: U5.3 U18.23
ADCB2: U5.5 U18.22
ADCB3: U5.6 U18.21
ADCB4: U5.8 U18.20
ADCB5: U5.9 U18.19
ADCB6: U5.11 U18.18
ADCB7: U5.12 U18.17
ADCCLK: U7.2 U18.14 U18.47
CLK0: JP4.3 U4.31 X1.3
CLK1: JP4.2 U4.32
CLK2: R34.2 U4.33 U4.34 U4.89 U4.90 U4.91 U4.92 U4.149 U4.150 U4.151 U4.152 U4.209 U4.210 U4.211 U4.212
CLKUSR: R24.2 U4.164
CONFDONE: R17.2 U4.153
D\C\L\K\: J3.30 U8.14
DATA0: R5.1 U4.24
DATA1: U1.5 U4.12
DB0: U3.2 U14.21 U15.21 U17.5
DB1: U3.3 U14.22 U15.22 U17.7
DB2: U3.5 U14.23 U15.23 U17.10
DB3: U3.6 U14.25 U15.25 U17.12
DB4: U3.8 U14.26 U15.26 U17.15
DB5: U3.9 U14.27 U15.27 U17.17
DB6: U3.11 U14.28 U15.28 U17.20
DB7: U3.12 U14.29 U15.29 U17.22
DB8: U3.13 U17.43
DB9: U3.14 U17.45
DB10: U3.16 U17.48
DB11: U3.17 U17.50
DB12: U3.19 U17.53
DB13: U3.20 U17.55
DB14: U3.22 U17.58
DB15: U3.23 U17.60
DCLK: U1.6 U4.23
DEVCLRN: R14.2 U4.144 U4.145
FLASH_NCE: U1.1 U4.14
FLASHC\S\: U7.12 U14.30
GND: C1.1 C2.1 C3.1 C4.1 C5.1 C6.1 C7.1 C8.1 C9.1 C10.1 C11.1 C12.1 C13.1 C14.1 C15.1 C16.1 C17.1 C18.1 C19.1 C20.1 C21.1 C22.1 C23.1 C24.1 C25.1 C26.1 C27.1 C28.1 C29.1 C30.1 C31.1 C32.1 C33.1 C34.1 C35.1 C36.1 C37.1 C38.1 C39.1 C40.1 C41.1 C42.1 C43.1 C44.1 C45.1 C46.1 C47.1 C48.1 C49.1 C50.1 C51.1 C52.1 C53.1 C54.1 C55.1 C56.1 C57.1 C58.1 C59.1 C60.1 C61.1 D3.1 D4.1 J1.2 J1.10 J2.1 J2.3 J3.3 J3.5 J3.6 J3.7 J3.13 J3.14 J3.15 J3.21 J3.22 J3.23 J3.29 J3.36 J4.2 J5.2 J6.2 J7.PGGND JP1.3 JP2.3 JP3.3 JP4.1 R6.1 R7.1 R8.1 R9.1 R10.2 R12.2 R15.1 R18.1 R21.1 R22.2 R23.2 R24.1 R25.2 R26.2 R27.2 R28.2 R29.2 R30.2 R31.2 R32.2 R33.2 R34.1 R35.2 R36.2 R38.2 R39.2 R40.2 R42.2 R43.2 R47.2 R48.2 R49.2 R51.2 R52.2 R54.1 R56.1 R60.2 R61.2 R62.2 R63.1 R69.2 R70.2 S1.1 S2.2 S3.2 S4.2 S5.2 S6.2 S7.1 S8.1 SW1.2 SW2.2 SW3.2 SW4.2 SW5.2 U1.4 U2.4 U2.10 U2.15 U2.21 U2.28 U2.34 U2.39 U2.45 U3.4 U3.10 U3.15 U3.21 U3.28 U3.34 U3.39 U3.45 U4.2 U4.8 U4.11 U4.16 U4.20 U4.36 U4.42 U4.48 U4.54 U4.59 U4.62 U4.67 U4.75 U4.79 U4.86 U4.97 U4.102 U4.105 U4.116 U4.122 U4.125 U4.130 U4.138 U4.141 U4.156 U4.165 U4.172 U4.175 U4.179 U4.191 U4.193 U4.199 U4.205 U4.208 U4.215 U4.222 U4.227 U4.229 U5.4 U5.10 U5.15 U5.21 U5.28 U5.34 U5.39 U5.45 U6.4 U6.10 U6.15 U6.21 U6.28 U6.34 U6.39 U6.45 U7.4 U7.10 U7.15 U7.21 U7.28 U7.34 U7.39 U7.45 U8.4 U8.10 U8.15 U8.21 U8.28 U8.34 U8.39 U8.45 U9.1 U10.4 U10.10 U10.15 U10.21 U10.28 U10.34 U10.39 U10.45 U11.2 U12.1 U13.1 U14.24 U15.24 U16.4 U16.10 U16.15 U16.21 U16.28 U16.34 U16.39 U16.45 U17.3 U17.13 U17.23 U17.33 U17.42 U17.52 U17.62 U18.1 U18.3 U18.10 U18.12 U18.16 U18.27 U18.29 U18.32 U18.34 U18.45 X1.2
H\S\Y\N\C\: J3.32 U8.16
I2C-SCL: J4.3 R4.1 U4.51
I2C-SDA: J4.4 R3.1 U4.52
INITDONE: R16.2 U4.159
IO4: U4.4 U7.47
IO5: U4.5 U7.46
IO6: U4.6 U7.44
IO9: U4.9 U7.43
IO13: U4.13 U7.41
IO18: U4.18 U7.40
IO21: U4.21 U7.38
IO22: U4.22 U6.26
IO37: U4.37
IO38: U4.38 U8.47
IO39: U4.39 U8.46
IO41: U4.41 U8.44
IO43: U4.43 U8.43
IO44: U4.44 U8.41
IO45: U4.45 U8.38 U8.40
IO46: U4.46 U8.37
IO49: U4.49 U8.36
IO50: U4.50 U8.35
IO63: U4.63 U5.47
IO64: U4.64 U5.46
IO65: U4.65 U5.44
IO68: U4.68 U5.43
IO69: U4.69 U7.37
IO70: U4.70 U8.33
IO71: U4.71 U5.41
IO72: U4.72 U5.40
IO73: U4.73 U5.38
IO76: U4.76 U5.37
IO78: U4.78 U5.36
IO80: U4.80 U5.35
IO81: U4.81 U5.33
IO82: U4.82 U5.32
IO83: U4.83 U5.30
IO84: U4.84 U5.29
IO87: U4.87 U5.27
IO88: U4.88 U5.26
IO93: U2.47 U4.93
IO94: U2.46 U4.94
IO95: U2.44 U4.95
IO98: U2.43 U4.98
IO99: U2.41 U4.99
IO100: U2.40 U4.100
IO103: U2.38 U4.103
IO106: U2.37 U4.106
IO107: U2.36 U4.107
IO108: U2.35 U4.108
IO109: U2.33 U4.109
IO110: U2.32 U4.110
IO111: U2.30 U4.111
IO112: U2.29 U4.112
IO113: U2.27 U4.113
IO114: U2.26 U4.114
IO117: U4.117
IO118: U4.118
IO119: U4.119
IO120: U4.120
IO126: U4.126 U6.47
IO127: U4.127 U6.46
IO128: U4.128 U6.44
IO131: U4.131 U6.43
IO132: U4.132 U6.41
IO133: U4.133 U6.40
IO134: U4.134 U6.38
IO135: U4.135 U6.37
IO137: U4.137 U6.36
IO139: U4.139 U6.35
IO142: U4.142 U6.33
IO143: U4.143 U6.32
IO146: U4.146 U6.30
IO147: U4.147 U6.29
IO148: U4.148 U6.27
IO160: U4.160 U8.32
IO161: U4.161 U8.30
IO162: U4.162 U8.29
IO166: U4.166 U7.26
IO167: U4.167 U7.27
IO168: U4.168 U7.29
IO169: U4.169 U7.30
IO171: U4.171 U7.32
IO173: U4.173 U7.33
IO176: U4.176 U7.35
IO177: U4.177 U7.36
IO181: U3.47 U4.181
IO182: U3.46 U4.182
IO183: U3.44 U4.183
IO184: U3.43 U4.184
IO185: U3.41 U4.185
IO186: U3.40 U4.186
IO187: U3.38 U4.187
IO188: U3.37 U4.188
IO189: U3.36 U4.189
IO194: U3.35 U4.194
IO195: U3.33 U4.195
IO196: U3.32 U4.196
IO197: U3.30 U4.197
IO200: U3.29 U4.200
IO201: U3.27 U4.201
IO202: U3.26 U4.202
IO203: U3.1 U3.24 U4.203
IO207: U4.207
IO214: U4.214 U10.47
IO216: U4.216 U10.46
IO217: U4.217 U10.44
IO218: U4.218 U10.43
IO219: U4.219 U10.41
IO221: U4.221 U10.40
IO223: U4.223 U10.38
IO224: U4.224 U10.37
IO226: U4.226 U10.48
IO230: U4.230 U10.36
IO231: U4.231 U10.35
IO232: U4.232 U10.33
IO233: U4.233 U10.32
IO234: U4.234 U10.30
IO235: U4.235 U10.29
IO236: U4.236 U10.27
IO237: U4.237 U10.26
IO238: U4.238 U10.25
IO239: U4.239 U8.27
IO240: U4.240 U8.26
LOG0: P3.1 U7.23
LOG1: P3.2 U7.22
LOG2: P3.3 U7.20
LOG3: P3.4 U7.19
LOG4: P3.5 U7.17
LOG5: P3.6 U7.16
LOG6: P3.7 U7.14
LOG7: P3.8 U7.13
MSEL0: JP1.2 R6.2 U4.155
MSEL1: JP2.2 R7.2 U4.157
MSEL2: JP3.2 R8.2 U4.158
N\C\E\: R15.2 U4.30
N\C\O\N\F\I\G\: R20.2 R21.2 U4.25 U11.1
N\S\T\A\T\U\S\: R18.2 R19.2 U4.17
NetD1_1: D1.1 D3.2 R67.1 R69.1 U18.2
NetD1_2: D1.2 D2.2 U18.5 U18.6 U18.7
NetD2_1: D2.1 D4.2 R68.1 R70.1 U18.11
NetJ3_2: J3.2 R53.2
NetJ3_8: J3.8 U16.23
NetJ3_9: J3.9 U16.22
NetJ3_10: J3.10 U16.20
NetJ3_11: J3.11 U16.19
NetJ3_12: J3.12 U16.17
NetJ3_16: J3.16 U16.16
NetJ3_17: J3.17 U16.14
NetJ3_18: J3.18 U16.13
NetJ3_19: J3.19 U16.12
NetJ3_20: J3.20 U16.11
NetJ3_24: J3.24 U16.9
NetJ3_25: J3.25 U16.8
NetJ3_26: J3.26 U16.6
NetJ3_27: J3.27 U16.5
NetJ3_28: J3.28 U16.3
NetJ3_31: J3.31 R58.1
NetJ3_34: J3.34 R59.1
NetJ4_6: J4.6 R63.2
NetJ5_1: J5.1 R67.2
NetJ6_1: J6.1 R68.2
NetR5_2: R5.2 U1.2
NetR10_1: R10.1 U2.25
NetR11_1: R11.1 U2.24
NetR12_1: R12.1 U2.48
NetR13_1: R13.1 U2.1
NetR22_1: R22.1 U3.48
NetR23_1: R23.1 U3.25
NetR25_1: R25.1 U5.25
NetR26_1: R26.1 U5.24
NetR27_1: R27.1 U5.48
NetR28_1: R28.1 U5.1
NetR29_1: R29.1 U6.1
NetR30_1: R30.1 U6.48
NetR31_1: R31.1 U6.24
NetR32_1: R32.1 U6.25
NetR33_1: R33.1 U7.25
NetR35_1: R35.1 U7.24
NetR36_1: R36.1 U7.48
NetR37_1: R37.1 U7.1
NetR38_1: R38.1 U8.1
NetR39_1: R39.1 U8.48
NetR40_1: R40.1 U8.24
NetR41_1: R41.1 U8.25
NetR42_1: R42.1 U10.24
NetR43_1: R43.1 U10.1
NetR44_2: R44.2 X1.1
NetR45_1: R45.1 U12.3
NetR46_1: R46.1 U13.3
NetR47_1: R47.1 U14.32
NetR48_1: R48.1 U14.10
NetR49_1: R49.1 U14.6
NetR50_2: R50.2 U15.6
NetR51_1: R51.1 U15.32
NetR52_1: R52.1 U15.10
NetR54_2: R54.2 U16.25
NetR55_2: R55.2 U16.24
NetR56_2: R56.2 U16.48
NetR57_2: R57.2 U16.1
NetR60_1: R60.1 U17.63
NetR61_1: R61.1 U17.41
NetR62_1: R62.1 U17.38
NetR64_2: R64.2 U18.8
NetR65_2: R65.2 U18.9
NetR66_2: R66.2 U18.4
NetS1_2: S1.2 U11.3
R/W\: U7.5 U14.7 U15.5 U17.24 U17.25
ROT0A: R87.1 SW1.1 U8.2
ROT0B: R86.1 SW1.3 U8.3
ROT1A: R85.1 SW2.1 U8.5
ROT1B: R84.1 SW2.3 U8.6
ROT2A: R83.1 SW3.1 U8.8
ROT2B: R82.1 SW3.3 U8.9
ROT3A: R81.1 SW4.1 U8.11
ROT3B: R80.1 SW4.3 U8.12
ROT4A: R79.1 SW5.1 U6.22
ROT4B: R78.1 SW5.3 U6.23
SC: U8.13 U17.64
SDQB0: U16.36 U17.4
SDQB1: U16.35 U17.6
SDQB2: U16.33 U17.9
SDQB3: U16.32 U17.11
SDQB4: U16.30 U17.14
SDQB5: U16.29 U17.16
SDQB6: U16.27 U17.19
SDQB7: U16.26 U17.21
SDQB8: U16.37 U17.44
SDQB9: U16.38 U17.46
SDQB10: U16.40 U17.49
SDQB11: U16.41 U17.51
SDQB12: U16.43 U17.54
SDQB13: U16.44 U17.56
SDQB14: U16.46 U17.59
SDQB15: U16.47 U17.61
SPI-MISO: U4.55
SPI-MOSI: U4.56
SPI-SCK: U4.57
SRAMC\S\: U7.11 U15.30
SW0: R77.1 S2.1 U6.2
SW1: R76.1 S3.1 U6.3
SW2: R75.1 S4.1 U6.5
SW3: R74.1 S5.1 U6.6
SW4: R73.1 S6.1 U6.8
SW5: R72.1 S7.3 U6.9
SW6: R71.1 S8.3 U6.11
SW7: U6.12
SW8: U6.13
SW9: U6.14
SW10: U6.16
SW11: U6.17
SW12: U6.19
SW13: U6.20
TCK: J1.1 R9.2 U4.27
TDI: J1.9 R1.1 U4.26
TDO: J1.3 U4.29
TMS: J1.5 R2.1 U4.28
UB0: P1.1 U10.23
UB1: P1.2 U10.22
UB2: P1.3 U10.20
UB3: P1.4 U10.19
UB4: P1.5 U10.17
UB5: P1.6 U10.16
UB6: P1.7 U10.14
UB7: P1.8 U10.13
UB8: P2.1 U10.12
UB9: P2.2 U10.11
UB10: P2.3 U10.9
UB11: P2.4 U10.8
UB12: P2.5 U10.6
UB13: P2.6 U10.5
UB14: P2.7 U10.3
UB15: P2.8 U10.2
V12+: C22.2 J2.4 R53.1
V12-: C23.2 J2.2 J3.1
V\S\Y\N\C\: J3.33 U8.17
VCC: C2.2 C3.2 C4.2 C5.2 C6.2 C7.2 C8.2 C9.2 C10.2 C11.2 C12.2 C13.2 C14.2 C15.2 C16.2 C17.2 C18.2 C19.2 C20.2 C21.2 C42.2 C43.2 C44.2 C45.2 C46.2 C54.2 C55.2 C56.2 C57.2 C58.2 C59.2 C60.2 C61.2 J1.4 J1.6 J3.4 J4.1 J7.PGVCC R3.2 R4.2 R11.2 R13.2 R14.1 R16.1 R17.1 R19.1 R20.1 R37.2 R41.2 R44.1 R50.1 R55.1 R57.1 R58.2 R59.2 R64.1 R65.1 R66.1 R71.2 R72.2 R73.2 R74.2 R75.2 R76.2 R77.2 R78.2 R79.2 R80.2 R81.2 R82.2 R83.2 R84.2 R85.2 R86.2 R87.2 U1.3 U1.7 U1.8 U2.7 U2.18 U2.31 U2.42 U3.7 U3.18 U3.31 U3.42 U4.7 U4.15 U4.35 U4.47 U4.66 U4.77 U4.96 U4.104 U4.124 U4.136 U4.154 U4.170 U4.192 U4.206 U4.213 U4.225 U5.7 U5.18 U5.31 U5.42 U6.7 U6.18 U6.31 U6.42 U7.7 U7.18 U7.31 U7.42 U8.7 U8.18 U8.31 U8.42 U9.2 U10.7 U10.18 U10.31 U10.42 U11.5 U14.8 U15.8 U16.7 U16.18 U16.31 U16.42 U18.13 U18.15 U18.28 U18.30 U18.31 U18.33 U18.46 U18.48 X1.4
VCC5: C1.2 C47.2 C48.2 C49.2 C50.2 C51.2 C52.2 C53.2 J2.5 R45.2 R46.2 U9.3 U17.1 U17.8 U17.18 U17.32 U17.47 U17.57
VCCA: C37.2 C38.2 C39.2 C40.2 C41.2 J1.8 JP1.1 JP2.1 JP3.1 R1.2 R2.2 U4.3 U4.58 U4.123 U4.178 U13.2
VCCINT: C24.2 C25.2 C26.2 C27.2 C28.2 C29.2 C30.2 C31.2 C32.2 C33.2 C34.2 C35.2 C36.2 U4.1 U4.10 U4.19 U4.40 U4.53 U4.60 U4.61 U4.74 U4.85 U4.101 U4.115 U4.121 U4.129 U4.140 U4.163 U4.174 U4.180 U4.190 U4.198 U4.204 U4.220 U4.228 U12.2
VRAMC\A\S\: U7.6 U17.39
VRAMR\A\S\: U7.8 U17.26
VRAMT\R\G\: U7.9 U17.2
WDTCLR: U7.3 U11.4
pads on no net: J1.7 J2. J3.35 J3.37 J3.38 J3.39 J3.40 J4.5 J5. J6. J7.1 J7.2 J7.3 J7.4 J7.5 J7.6 J7.7 J7.8 J7.9 J7.10 J7.11 J7.12 J7.13 J7.14 J7.15 J7.16 J7.17 J7.18 J7.19 J7.20 S7.2 S7.4 S7.5 S7.6 S8.2 S8.4 S8.5 S8.6 U8.19 U8.20 U8.22 U8.23 U9. U12. U13. U14.9 U15.9 U16.2 U17.40 U18.25 U18.26 U18.35 U18.36

## Keep-outs
Keep-Out Layer:
  lines w10: 13525,11710 13825,11710 ; 12560,7205 12560,13005 ; 12560,7205 16460,7205 ; 12560,7205 12560,13005 ; 12560,7205 16460,7205 ; 12560,13005 16460,13005 ; 12560,13005 16460,13005 ; 16460,7205 16460,7655 ; 16460,7205 16460,7655 ; 16460,7655 16960,7655 ; 16460,7655 16960,7655 ; 16460,12555 16460,13005 ; 16460,12555 16960,12555 ; 16460,12555 16460,13005 ; 16460,12555 16960,12555 ; 16960,7205 20860,7205 ; 16960,7205 16960,7655 ; 16960,7205 20860,7205 ; 16960,7205 16960,7655 ; 16960,12555 16960,13005 ; 16960,12555 16960,13005 ; 16960,13005 20860,13005 ; 16960,13005 20860,13005 ; 20860,7205 20860,13005 ; 20860,7205 20860,13005

## Other copper
Top Layer:
  text ".LAYER_NAME" at 21610,7405 h100
Bottom Layer:
  text ".LAYER_NAME" at 21610,7405 h100

## Silkscreen, mask and mechanical layers (free items; w line width, h text height)
Top Overlay:
  text ".LAYER_NAME" at 21610,7405 h100
Bottom Overlay:
  text ".LAYER_NAME" at 21610,7405 h100
Top Solder:
  text ".LAYER_NAME" at 21610,7405 h100
Bottom Solder:
  text ".LAYER_NAME" at 21610,7405 h100
Drill Guide:
  text ".LAYER_NAME" at 21610,7405 h100
Mechanical 1:
  lines w10: 12560,7005 12560,7055 ; 12560,13105 12560,13155 ; 12560,13410 12560,13480 ; 12626.87,7007.71 12560,7030 ; 12626.87,7052.29 12560,7030 ; 12626.87,13107.71 12560,13130 ; 12626.87,13152.29 12560,13130 ; 12626.87,13422.71 12560,13445 ; 12626.87,13467.29 12560,13445 ; 13525,11710 13525,12010 13825,12010 13825,11710 ; 14116.61,7030 12560,7030 ; 14116.61,13130 12560,13130 ; 14838.39,7030 16460,7030 ; 14838.39,13130 16460,13130 ; 16393.13,7007.71 16460,7030 ; 16393.13,7052.29 16460,7030 ; 16393.13,13107.71 16460,13130 ; 16393.13,13152.29 16460,13130 ; 16430,13445 12560,13445 ; 16460,6885 16460,7085 ; 16460,13085 16460,13265 ; 16526.87,6917.71 16460,6940 ; 16526.87,6962.29 16460,6940 ; 16526.87,13197.71 16460,13220 ; 16526.87,13242.29 16460,13220 ; 16675,7205 16745,7205 ; 16675,13005 16745,13005 ; 16685,7655 16735,7655 ; 16685,12555 16735,12555 ; 16687.71,7271.87 16710,7205 16732.29,7271.87 ; 16687.71,7588.13 16710,7655 ; 16687.71,12621.87 16710,12555 ; 16687.71,12938.13 16710,13005 ; 16710,7208.4 16710,7655 ; 16732.29,7588.13 16710,7655 ; 16732.29,12621.87 16710,12555 ; 16732.29,12938.13 16710,13005 ; 16893.13,6917.71 16960,6940 ; 16893.13,6962.29 16960,6940 ; 16893.13,13197.71 16960,13220 ; 16893.13,13242.29 16960,13220 ; 16960,6915 16960,6965 ; 16960,13195 16960,13245 ; 17130,13445 20860,13445 ; 20793.13,13422.71 20860,13445 ; 20793.13,13467.29 20860,13445 ; 20860,13410 20860,13480 ; 20960,7205 21050,7205 ; 20960,13005 21050,13005 ; 20977.71,7271.87 21005,7205 ; 20977.71,12938.13 21005,13005 ; 21005,9656.61 21005,7205 ; 21005,10358.39 21005,13005 ; 21032.29,7271.87 21005,7205 ; 21032.29,12938.13 21005,13005 ; 16460,6940 16960,6940 ; 16460,13220 16960,13220 ; 16710,12555 16710,13005 ; 12560,7205 16460,7205 16460,7655 16960,7655 16960,7205 20860,7205 20860,13005 16960,13005 16960,12555 16460,12555 16460,13005 12560,13005 12560,7205 ; 13525,8200 13825,8200 13825,8500 13525,8500 13525,8200 ; 19595,8200 19895,8200 19895,8500 19595,8500 19595,8200 ; 19595,11710 19895,11710 19895,12010 19595,12010 19595,11710
  text "8300mil" at 16471.61,13411.56 h100
  text "500mil" at 16551.6,13261.56 h60
  text "3900mil" at 14171.61,13096.56 h100
  text "450mil" at 16818.44,12621.6 h60 r90
  text "5800mil" at 20971.56,10318.39 h100 r270
  text "450mil" at 16591.56,7588.4 h60 r270
  text ".LAYER_NAME" at 21610,7405 h100
  text "3900mil" at 14171.61,6996.56 h100
  text "500mil" at 16551.6,6981.56 h60
Mechanical 3:
  text ".LAYER_NAME" at 21610,7405 h100
Mechanical 4:
  lines w30: 12545,7400 12545,7190 12755,7190 ; 12545,12810 12545,13020 12755,13020 ; 20665,7190 20875,7190 20875,7400
Drill Drawing:
  text ".LAYER_NAME" at 21610,7405 h100

## Text inside footprints (layer, text, board x,y; h text height)
J1: Top Overlay "1" at 15000,12680 h50; Top Overlay "5" at 15560,12680 h50; Top Overlay "10" at 15560,12780 h50; Top Overlay "6" at 15000,12780 h50